# EAGLE board (Panelized-8)TheLittleEngineers.org-2732-TOFROM-2532-GCC-ECS-0001.2-09.APRIL.2019-02.JUNE.2019 (EAGLE 5.10)
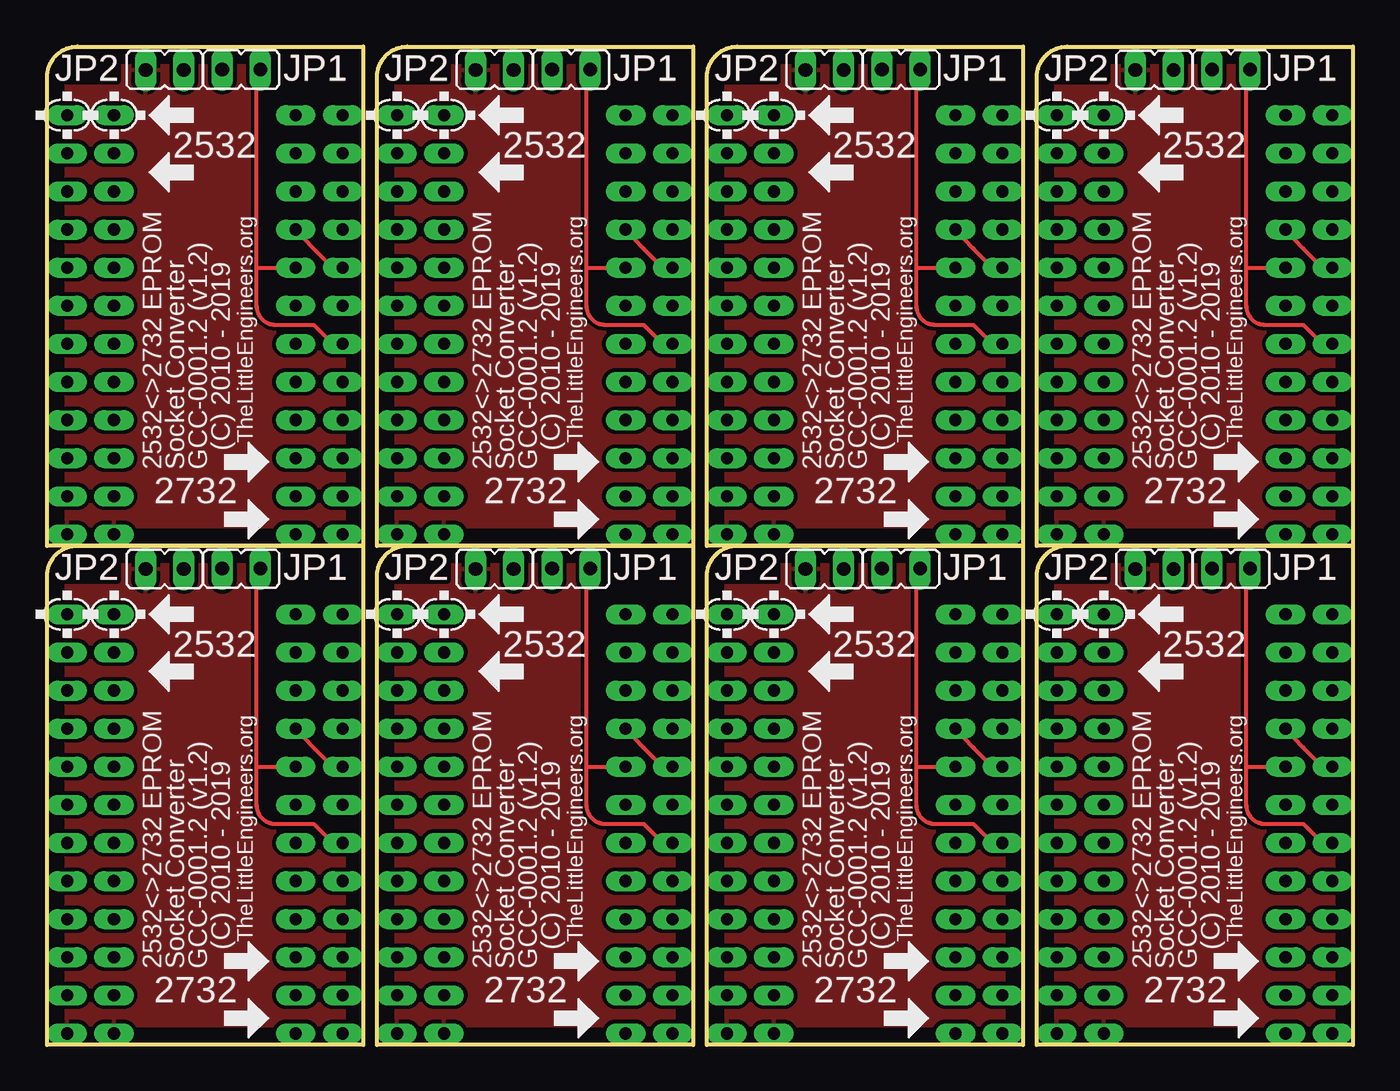
[diagram p0: board, top side]
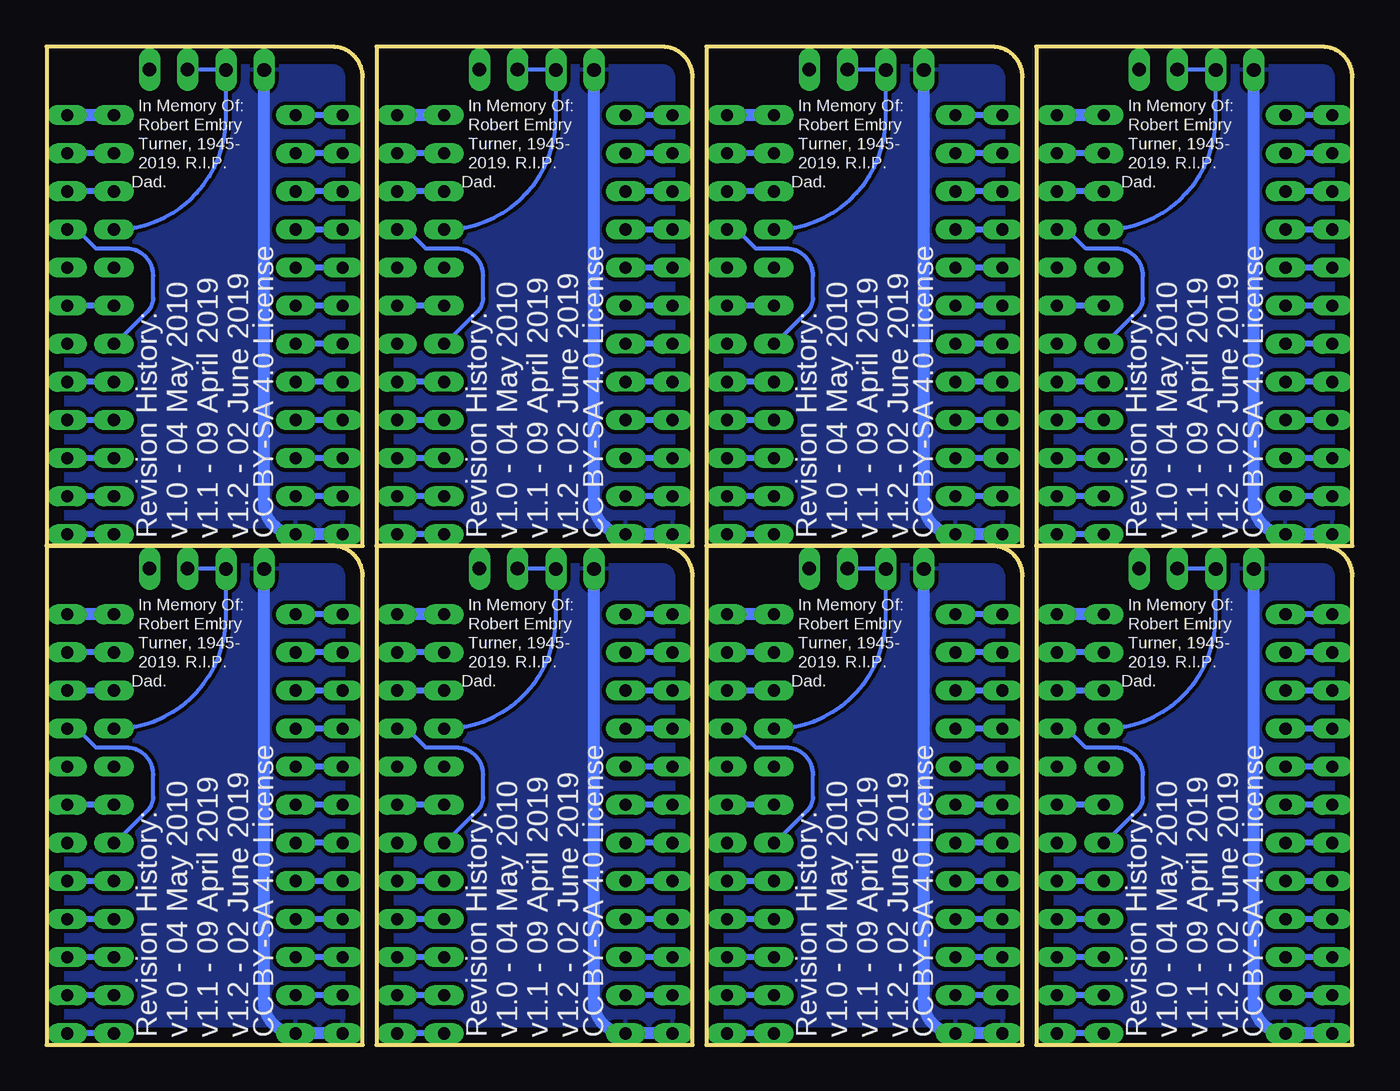
[diagram p1: board, bottom side, seen from below]

Size 87.08 x 66.54 mm. Coordinates in mm from the lower left corner, seen from the top.
Outline: 21.08,66.54 21.08,33.27 0,33.27 0,64.51 arc-90 2.03,66.54 21.08,66.54
Outline: 43.08,66.54 43.08,33.27 22,33.27 22,64.51 arc-90 24.03,66.54 43.08,66.54
Outline: 65.08,66.54 65.08,33.27 44,33.27 44,64.51 arc-90 46.03,66.54 65.08,66.54
Outline: 87.08,66.54 87.08,33.27 66,33.27 66,64.51 arc-90 68.03,66.54 87.08,66.54
Outline: 21.08,33.27 21.08,0 0,0 0,31.24 arc-90 2.03,33.27 21.08,33.27
Outline: 43.08,33.27 43.08,0 22,0 22,31.24 arc-90 24.03,33.27 43.08,33.27
Outline: 65.08,33.27 65.08,0 44,0 44,31.24 arc-90 46.03,33.27 65.08,33.27
Outline: 87.08,33.27 87.08,0 66,0 66,31.24 arc-90 68.03,33.27 87.08,33.27
Copper layers (1*16): Top 0.035mm / dielectric 1.5mm / Bottom 0.035mm
Design rules "default": minimum track width 10mil, minimum drill 24mil, track to track 8mil, track to pad 8mil, pad to pad 8mil, via to via 8mil, smd to smd 8mil, copper to edge 40mil, drill to drill 8mil, minimum pad ring 10mil, minimum via ring 8mil, stop-mask expansion 4mil, vias tented up to drill 0mil, thermal gap 10mil
Net classes: 0 default: width 0.203 mm, clearance 0.203 mm; 1 power: width 0.762 mm, clearance 0.254 mm

## Footprints (pad centres in the part's own frame; a part is rotated, then mirrored left to right if it is on the bottom)
DIL24 = drill 0.813 long: 1 -13.97,-7.62; 2 -11.43,-7.62; 3 -8.89,-7.62; 4 -6.35,-7.62; 5 -3.81,-7.62; 6 -1.27,-7.62; 7 1.27,-7.62; 8 3.81,-7.62; 9 6.35,-7.62; 10 8.89,-7.62; 11 11.43,-7.62; 12 13.97,-7.62; 13 13.97,7.62; 14 11.43,7.62; 15 8.89,7.62; 16 6.35,7.62; 17 3.81,7.62; 18 1.27,7.62; 19 -1.27,7.62; 20 -3.81,7.62; 21 -6.35,7.62; 22 -8.89,7.62; 23 -11.43,7.62; 24 -13.97,7.62
JP1 = drill 0.914 long: 1 0,-1.27; 2 0,1.27

## Placement (x,y rotation side)
IC1  2532  [DIL24]  8.97,48 270 top
IC2  2732  [DIL24]  12.09,48 270 top
IC3  2532  [DIL24]  30.97,48 270 top
IC4  2732  [DIL24]  34.09,48 270 top
IC5  2532  [DIL24]  52.97,48 270 top
IC6  2732  [DIL24]  56.09,48 270 top
IC7  2532  [DIL24]  74.97,48 270 top
IC8  2732  [DIL24]  78.09,48 270 top
IC9  2532  [DIL24]  8.97,14.73 270 top
IC10  2732  [DIL24]  12.09,14.73 270 top
IC11  2532  [DIL24]  30.97,14.73 270 top
IC12  2732  [DIL24]  34.09,14.73 270 top
IC13  2532  [DIL24]  52.97,14.73 270 top
IC14  2732  [DIL24]  56.09,14.73 270 top
IC15  2532  [DIL24]  74.97,14.73 270 top
IC16  2732  [DIL24]  78.09,14.73 270 top
JP1  [JP1]  12.95,65.02 270 top
JP2  [JP1]  7.85,64.99 270 top
JP3  [JP1]  34.95,65.02 270 top
JP4  [JP1]  29.85,64.99 270 top
JP5  [JP1]  56.95,65.02 270 top
JP6  [JP1]  51.85,64.99 270 top
JP7  [JP1]  78.95,65.02 270 top
JP8  [JP1]  73.85,64.99 270 top
JP9  [JP1]  12.95,31.75 270 top
JP10  [JP1]  7.85,31.72 270 top
JP11  [JP1]  34.95,31.75 270 top
JP12  [JP1]  29.85,31.72 270 top
JP13  [JP1]  56.95,31.75 270 top
JP14  [JP1]  51.85,31.72 270 top
JP15  [JP1]  78.95,31.75 270 top
JP16  [JP1]  73.85,31.72 270 top
U$1  [ARROW-L]  8.13,61.97 0 top
U$2  [ARROW-L]  8.13,58.16 0 top
U$3  [ARROW-R]  13.46,38.86 0 top
U$4  [ARROW-R]  13.46,35.05 0 top
U$5  [ARROW-L]  30.13,61.97 0 top
U$6  [ARROW-L]  30.13,58.16 0 top
U$7  [ARROW-R]  35.46,38.86 0 top
U$8  [ARROW-R]  35.46,35.05 0 top
U$9  [ARROW-L]  52.13,61.97 0 top
U$10  [ARROW-L]  52.13,58.16 0 top
U$11  [ARROW-R]  57.46,38.86 0 top
U$12  [ARROW-R]  57.46,35.05 0 top
U$13  [ARROW-L]  74.13,61.97 0 top
U$14  [ARROW-L]  74.13,58.16 0 top
U$15  [ARROW-R]  79.46,38.86 0 top
U$16  [ARROW-R]  79.46,35.05 0 top
U$17  [ARROW-L]  8.13,28.7 0 top
U$18  [ARROW-L]  8.13,24.89 0 top
U$19  [ARROW-R]  13.46,5.59 0 top
U$20  [ARROW-R]  13.46,1.78 0 top
U$21  [ARROW-L]  30.13,28.7 0 top
U$22  [ARROW-L]  30.13,24.89 0 top
U$23  [ARROW-R]  35.46,5.59 0 top
U$24  [ARROW-R]  35.46,1.78 0 top
U$25  [ARROW-L]  52.13,28.7 0 top
U$26  [ARROW-L]  52.13,24.89 0 top
U$27  [ARROW-R]  57.46,5.59 0 top
U$28  [ARROW-R]  57.46,1.78 0 top
U$29  [ARROW-L]  74.13,28.7 0 top
U$30  [ARROW-L]  74.13,24.89 0 top
U$31  [ARROW-R]  79.46,5.59 0 top
U$32  [ARROW-R]  79.46,1.78 0 top

## Library data of the parts
IC1-IC16 JP1-JP16 U$1-U$32 = TheLittleEngineers.org-2732-TOFROM-2532-GCC-ECS-0001.2-09.APRIL.2019-02.JUNE.2019

## Nets
GND [power]: IC1.12 IC2.12 JP2.1
GND1 [power]: IC3.12 IC4.12 JP4.1
GND2 [power]: IC5.12 IC6.12 JP6.1
GND3 [power]: IC7.12 IC8.12 JP8.1
GND4 [power]: IC9.12 IC10.12 JP10.1
GND5 [power]: IC11.12 IC12.12 JP12.1
GND6 [power]: IC13.12 IC14.12 JP14.1
GND7 [power]: IC15.12 IC16.12 JP16.1
N$1: IC1.8 IC2.8
N$2: IC1.7 IC2.7
N$3: IC1.6 IC2.6
N$4: IC1.5 IC2.5
N$5: IC1.4 IC2.4
N$6: IC1.3 IC2.3
N$7: IC1.2 IC2.2
N$8: IC1.1 IC2.1
N$9: IC1.23 IC2.23
N$10: IC1.22 IC2.22
N$11: IC1.19 IC2.19
N$12: IC1.18 IC2.21
N$13: IC1.20 IC2.18 JP1.2
N$14: IC1.21 IC2.20 JP1.1 JP2.2
N$15: IC1.9 IC2.9
N$16: IC1.10 IC2.10
N$17: IC1.11 IC2.11
N$18: IC1.13 IC2.13
N$19: IC1.14 IC2.14
N$20: IC1.15 IC2.15
N$21: IC1.16 IC2.16
N$22: IC1.17 IC2.17
N$23: IC3.8 IC4.8
N$24: IC3.7 IC4.7
N$25: IC3.6 IC4.6
N$26: IC3.5 IC4.5
N$27: IC3.4 IC4.4
N$28: IC3.3 IC4.3
N$29: IC3.2 IC4.2
N$30: IC3.1 IC4.1
N$31: IC3.23 IC4.23
N$32: IC3.22 IC4.22
N$33: IC3.19 IC4.19
N$34: IC3.18 IC4.21
N$35: IC3.20 IC4.18 JP3.2
N$36: IC3.21 IC4.20 JP3.1 JP4.2
N$37: IC3.9 IC4.9
N$38: IC3.10 IC4.10
N$39: IC3.11 IC4.11
N$40: IC3.13 IC4.13
N$41: IC3.14 IC4.14
N$42: IC3.15 IC4.15
N$43: IC3.16 IC4.16
N$44: IC3.17 IC4.17
N$45: IC5.8 IC6.8
N$46: IC5.7 IC6.7
N$47: IC5.6 IC6.6
N$48: IC5.5 IC6.5
N$49: IC5.4 IC6.4
N$50: IC5.3 IC6.3
N$51: IC5.2 IC6.2
N$52: IC5.1 IC6.1
N$53: IC5.23 IC6.23
N$54: IC5.22 IC6.22
N$55: IC5.19 IC6.19
N$56: IC5.18 IC6.21
N$57: IC5.20 IC6.18 JP5.2
N$58: IC5.21 IC6.20 JP5.1 JP6.2
N$59: IC5.9 IC6.9
N$60: IC5.10 IC6.10
N$61: IC5.11 IC6.11
N$62: IC5.13 IC6.13
N$63: IC5.14 IC6.14
N$64: IC5.15 IC6.15
N$65: IC5.16 IC6.16
N$66: IC5.17 IC6.17
N$67: IC7.8 IC8.8
N$68: IC7.7 IC8.7
N$69: IC7.6 IC8.6
N$70: IC7.5 IC8.5
N$71: IC7.4 IC8.4
N$72: IC7.3 IC8.3
N$73: IC7.2 IC8.2
N$74: IC7.1 IC8.1
N$75: IC7.23 IC8.23
N$76: IC7.22 IC8.22
N$77: IC7.19 IC8.19
N$78: IC7.18 IC8.21
N$79: IC7.20 IC8.18 JP7.2
N$80: IC7.21 IC8.20 JP7.1 JP8.2
N$81: IC7.9 IC8.9
N$82: IC7.10 IC8.10
N$83: IC7.11 IC8.11
N$84: IC7.13 IC8.13
N$85: IC7.14 IC8.14
N$86: IC7.15 IC8.15
N$87: IC7.16 IC8.16
N$88: IC7.17 IC8.17
N$89: IC9.8 IC10.8
N$90: IC9.7 IC10.7
N$91: IC9.6 IC10.6
N$92: IC9.5 IC10.5
N$93: IC9.4 IC10.4
N$94: IC9.3 IC10.3
N$95: IC9.2 IC10.2
N$96: IC9.1 IC10.1
N$97: IC9.23 IC10.23
N$98: IC9.22 IC10.22
N$99: IC9.19 IC10.19
N$100: IC9.18 IC10.21
N$101: IC9.20 IC10.18 JP9.2
N$102: IC9.21 IC10.20 JP9.1 JP10.2
N$103: IC9.9 IC10.9
N$104: IC9.10 IC10.10
N$105: IC9.11 IC10.11
N$106: IC9.13 IC10.13
N$107: IC9.14 IC10.14
N$108: IC9.15 IC10.15
N$109: IC9.16 IC10.16
N$110: IC9.17 IC10.17
N$111: IC11.8 IC12.8
N$112: IC11.7 IC12.7
N$113: IC11.6 IC12.6
N$114: IC11.5 IC12.5
N$115: IC11.4 IC12.4
N$116: IC11.3 IC12.3
N$117: IC11.2 IC12.2
N$118: IC11.1 IC12.1
N$119: IC11.23 IC12.23
N$120: IC11.22 IC12.22
N$121: IC11.19 IC12.19
N$122: IC11.18 IC12.21
N$123: IC11.20 IC12.18 JP11.2
N$124: IC11.21 IC12.20 JP11.1 JP12.2
N$125: IC11.9 IC12.9
N$126: IC11.10 IC12.10
N$127: IC11.11 IC12.11
N$128: IC11.13 IC12.13
N$129: IC11.14 IC12.14
N$130: IC11.15 IC12.15
N$131: IC11.16 IC12.16
N$132: IC11.17 IC12.17
N$133: IC13.8 IC14.8
N$134: IC13.7 IC14.7
N$135: IC13.6 IC14.6
N$136: IC13.5 IC14.5
N$137: IC13.4 IC14.4
N$138: IC13.3 IC14.3
N$139: IC13.2 IC14.2
N$140: IC13.1 IC14.1
N$141: IC13.23 IC14.23
N$142: IC13.22 IC14.22
N$143: IC13.19 IC14.19
N$144: IC13.18 IC14.21
N$145: IC13.20 IC14.18 JP13.2
N$146: IC13.21 IC14.20 JP13.1 JP14.2
N$147: IC13.9 IC14.9
N$148: IC13.10 IC14.10
N$149: IC13.11 IC14.11
N$150: IC13.13 IC14.13
N$151: IC13.14 IC14.14
N$152: IC13.15 IC14.15
N$153: IC13.16 IC14.16
N$154: IC13.17 IC14.17
N$155: IC15.8 IC16.8
N$156: IC15.7 IC16.7
N$157: IC15.6 IC16.6
N$158: IC15.5 IC16.5
N$159: IC15.4 IC16.4
N$160: IC15.3 IC16.3
N$161: IC15.2 IC16.2
N$162: IC15.1 IC16.1
N$163: IC15.23 IC16.23
N$164: IC15.22 IC16.22
N$165: IC15.19 IC16.19
N$166: IC15.18 IC16.21
N$167: IC15.20 IC16.18 JP15.2
N$168: IC15.21 IC16.20 JP15.1 JP16.2
N$169: IC15.9 IC16.9
N$170: IC15.10 IC16.10
N$171: IC15.11 IC16.11
N$172: IC15.13 IC16.13
N$173: IC15.14 IC16.14
N$174: IC15.15 IC16.15
N$175: IC15.16 IC16.16
N$176: IC15.17 IC16.17
VCC [power]: IC1.24 IC2.24
VCC1 [power]: IC3.24 IC4.24
VCC2 [power]: IC5.24 IC6.24
VCC3 [power]: IC7.24 IC8.24
VCC4 [power]: IC9.24 IC10.24
VCC5 [power]: IC11.24 IC12.24
VCC6 [power]: IC13.24 IC14.24
VCC7 [power]: IC15.24 IC16.24

## Tracks (layer width: path | path; a pad name or v marks a point on that pad's centre or on a via)
GND
  Bottom 0.813: IC1.12 IC2.12 arc90 6.58,36.14 JP2.1
  pour Bottom: 21.08,66.54 0,66.54 0,33.27 21.08,33.27
  pour Top: 21.08,66.54 0,66.54 0,33.27 21.08,33.27
GND1
  Bottom 0.813: IC3.12 IC4.12 arc90 28.58,36.14 JP4.1
  pour Bottom: 43.08,66.54 22,66.54 22,33.27 43.08,33.27
  pour Top: 43.08,66.54 22,66.54 22,33.27 43.08,33.27
GND2
  Bottom 0.813: IC5.12 IC6.12 arc90 50.58,36.14 JP6.1
  pour Bottom: 65.08,66.54 44,66.54 44,33.27 65.08,33.27
  pour Top: 65.08,66.54 44,66.54 44,33.27 65.08,33.27
GND3
  Bottom 0.813: IC7.12 IC8.12 arc90 72.58,36.14 JP8.1
  pour Bottom: 87.08,66.54 66,66.54 66,33.27 87.08,33.27
  pour Top: 87.08,66.54 66,66.54 66,33.27 87.08,33.27
GND4
  Bottom 0.813: IC9.12 IC10.12 arc90 6.58,2.87 JP10.1
  pour Bottom: 21.08,33.27 0,33.27 0,0 21.08,0
  pour Top: 21.08,33.27 0,33.27 0,0 21.08,0
GND5
  Bottom 0.813: IC11.12 IC12.12 arc90 28.58,2.87 JP12.1
  pour Bottom: 43.08,33.27 22,33.27 22,0 43.08,0
  pour Top: 43.08,33.27 22,33.27 22,0 43.08,0
GND6
  Bottom 0.813: IC13.12 IC14.12 arc90 50.58,2.87 JP14.1
  pour Bottom: 65.08,33.27 44,33.27 44,0 65.08,0
  pour Top: 65.08,33.27 44,33.27 44,0 65.08,0
GND7
  Bottom 0.813: IC15.12 IC16.12 arc90 72.58,2.87 JP16.1
  pour Bottom: 87.08,33.27 66,33.27 66,0 87.08,0
  pour Top: 87.08,33.27 66,33.27 66,0 87.08,0
N$1
  Bottom 0.406: IC1.8 IC2.8
N$2
  Bottom 0.406: IC1.7 IC2.7
N$3
  Bottom 0.406: IC1.6 IC2.6
N$4
  Bottom 0.406: IC1.5 IC2.5
N$5
  Bottom 0.406: IC1.4 IC2.4
N$6
  Bottom 0.406: IC1.3 IC2.3
N$7
  Bottom 0.406: IC1.2 IC2.2
N$8
  Bottom 0.406: IC1.1 IC2.1
N$9
  Bottom 0.406: IC1.23 IC2.23
N$10
  Bottom 0.406: IC1.22 IC2.22
N$11
  Bottom 0.406: IC1.19 IC2.19
N$12
  Bottom 0.254: IC1.18 16.51,46.73 14.34,48.9 arc-45 13.97,49.8 13.97,51.29 arc-90 15.77,53.08 17.78,53.08 19.05,54.35 IC2.21
N$13
  Top 0.254: 13.97,51.81 13.97,64.51 JP1.2 | 13.97,51.81 13.97,49.27 arc90 15.24,48 17.78,48 19.05,46.73 IC2.18 | 13.97,51.81 IC1.20
N$14
  Top 0.254: IC2.20 19.05,51.81 17.78,53.08 IC1.21
  Bottom 0.254: 11.66,64.99 JP2.2 9.12,61.82 arc90 IC1.21
  Bottom 0.813: 11.66,64.99 arc90 JP1.1
N$15
  Bottom 0.406: IC1.9 IC2.9
N$16
  Bottom 0.406: IC1.10 IC2.10
N$17
  Bottom 0.406: IC1.11 IC2.11
N$18
  Bottom 0.406: IC1.13 IC2.13
N$19
  Bottom 0.406: IC1.14 IC2.14
N$20
  Bottom 0.406: IC1.15 IC2.15
N$21
  Bottom 0.406: IC1.16 IC2.16
N$22
  Bottom 0.406: IC1.17 IC2.17
N$23
  Bottom 0.406: IC3.8 IC4.8
N$24
  Bottom 0.406: IC3.7 IC4.7
N$25
  Bottom 0.406: IC3.6 IC4.6
N$26
  Bottom 0.406: IC3.5 IC4.5
N$27
  Bottom 0.406: IC3.4 IC4.4
N$28
  Bottom 0.406: IC3.3 IC4.3
N$29
  Bottom 0.406: IC3.2 IC4.2
N$30
  Bottom 0.406: IC3.1 IC4.1
N$31
  Bottom 0.406: IC3.23 IC4.23
N$32
  Bottom 0.406: IC3.22 IC4.22
N$33
  Bottom 0.406: IC3.19 IC4.19
N$34
  Bottom 0.254: IC3.18 38.51,46.73 36.34,48.9 arc-45 35.97,49.8 35.97,51.29 arc-90 37.77,53.08 39.78,53.08 41.05,54.35 IC4.21
N$35
  Top 0.254: 35.97,51.81 35.97,64.51 JP3.2 | 35.97,51.81 35.97,49.27 arc90 37.24,48 39.78,48 41.05,46.73 IC4.18 | 35.97,51.81 IC3.20
N$36
  Top 0.254: IC4.20 41.05,51.81 39.78,53.08 IC3.21
  Bottom 0.254: 33.66,64.99 JP4.2 31.12,61.82 arc90 IC3.21
  Bottom 0.813: 33.66,64.99 arc90 JP3.1
N$37
  Bottom 0.406: IC3.9 IC4.9
N$38
  Bottom 0.406: IC3.10 IC4.10
N$39
  Bottom 0.406: IC3.11 IC4.11
N$40
  Bottom 0.406: IC3.13 IC4.13
N$41
  Bottom 0.406: IC3.14 IC4.14
N$42
  Bottom 0.406: IC3.15 IC4.15
N$43
  Bottom 0.406: IC3.16 IC4.16
N$44
  Bottom 0.406: IC3.17 IC4.17
N$45
  Bottom 0.406: IC5.8 IC6.8
N$46
  Bottom 0.406: IC5.7 IC6.7
N$47
  Bottom 0.406: IC5.6 IC6.6
N$48
  Bottom 0.406: IC5.5 IC6.5
N$49
  Bottom 0.406: IC5.4 IC6.4
N$50
  Bottom 0.406: IC5.3 IC6.3
N$51
  Bottom 0.406: IC5.2 IC6.2
N$52
  Bottom 0.406: IC5.1 IC6.1
N$53
  Bottom 0.406: IC5.23 IC6.23
N$54
  Bottom 0.406: IC5.22 IC6.22
N$55
  Bottom 0.406: IC5.19 IC6.19
N$56
  Bottom 0.254: IC5.18 60.51,46.73 58.34,48.9 arc-45 57.97,49.8 57.97,51.29 arc-90 59.77,53.08 61.78,53.08 63.05,54.35 IC6.21
N$57
  Top 0.254: 57.97,51.81 57.97,64.51 JP5.2 | 57.97,51.81 57.97,49.27 arc90 59.24,48 61.78,48 63.05,46.73 IC6.18 | 57.97,51.81 IC5.20
N$58
  Top 0.254: IC6.20 63.05,51.81 61.78,53.08 IC5.21
  Bottom 0.254: 55.66,64.99 JP6.2 53.12,61.82 arc90 IC5.21
  Bottom 0.813: 55.66,64.99 arc90 JP5.1
N$59
  Bottom 0.406: IC5.9 IC6.9
N$60
  Bottom 0.406: IC5.10 IC6.10
N$61
  Bottom 0.406: IC5.11 IC6.11
N$62
  Bottom 0.406: IC5.13 IC6.13
N$63
  Bottom 0.406: IC5.14 IC6.14
N$64
  Bottom 0.406: IC5.15 IC6.15
N$65
  Bottom 0.406: IC5.16 IC6.16
N$66
  Bottom 0.406: IC5.17 IC6.17
N$67
  Bottom 0.406: IC7.8 IC8.8
N$68
  Bottom 0.406: IC7.7 IC8.7
N$69
  Bottom 0.406: IC7.6 IC8.6
N$70
  Bottom 0.406: IC7.5 IC8.5
N$71
  Bottom 0.406: IC7.4 IC8.4
N$72
  Bottom 0.406: IC7.3 IC8.3
N$73
  Bottom 0.406: IC7.2 IC8.2
N$74
  Bottom 0.406: IC7.1 IC8.1
N$75
  Bottom 0.406: IC7.23 IC8.23
N$76
  Bottom 0.406: IC7.22 IC8.22
N$77
  Bottom 0.406: IC7.19 IC8.19
N$78
  Bottom 0.254: IC7.18 82.51,46.73 80.34,48.9 arc-45 79.97,49.8 79.97,51.29 arc-90 81.77,53.08 83.78,53.08 85.05,54.35 IC8.21
N$79
  Top 0.254: 79.97,51.81 79.97,64.51 JP7.2 | 79.97,51.81 79.97,49.27 arc90 81.24,48 83.78,48 85.05,46.73 IC8.18 | 79.97,51.81 IC7.20
N$80
  Top 0.254: IC8.20 85.05,51.81 83.78,53.08 IC7.21
  Bottom 0.254: 77.66,64.99 JP8.2 75.12,61.82 arc90 IC7.21
  Bottom 0.813: 77.66,64.99 arc90 JP7.1
N$81
  Bottom 0.406: IC7.9 IC8.9
N$82
  Bottom 0.406: IC7.10 IC8.10
N$83
  Bottom 0.406: IC7.11 IC8.11
N$84
  Bottom 0.406: IC7.13 IC8.13
N$85
  Bottom 0.406: IC7.14 IC8.14
N$86
  Bottom 0.406: IC7.15 IC8.15
N$87
  Bottom 0.406: IC7.16 IC8.16
N$88
  Bottom 0.406: IC7.17 IC8.17
N$89
  Bottom 0.406: IC9.8 IC10.8
N$90
  Bottom 0.406: IC9.7 IC10.7
N$91
  Bottom 0.406: IC9.6 IC10.6
N$92
  Bottom 0.406: IC9.5 IC10.5
N$93
  Bottom 0.406: IC9.4 IC10.4
N$94
  Bottom 0.406: IC9.3 IC10.3
N$95
  Bottom 0.406: IC9.2 IC10.2
N$96
  Bottom 0.406: IC9.1 IC10.1
N$97
  Bottom 0.406: IC9.23 IC10.23
N$98
  Bottom 0.406: IC9.22 IC10.22
N$99
  Bottom 0.406: IC9.19 IC10.19
N$100
  Bottom 0.254: IC9.18 16.51,13.46 14.34,15.63 arc-45 13.97,16.53 13.97,18.02 arc-90 15.77,19.81 17.78,19.81 19.05,21.08 IC10.21
N$101
  Top 0.254: 13.97,18.54 13.97,31.24 JP9.2 | 13.97,18.54 13.97,16 arc90 15.24,14.73 17.78,14.73 19.05,13.46 IC10.18 | 13.97,18.54 IC9.20
N$102
  Top 0.254: IC10.20 19.05,18.54 17.78,19.81 IC9.21
  Bottom 0.254: 11.66,31.72 JP10.2 9.12,28.55 arc90 IC9.21
  Bottom 0.813: 11.66,31.72 arc90 JP9.1
N$103
  Bottom 0.406: IC9.9 IC10.9
N$104
  Bottom 0.406: IC9.10 IC10.10
N$105
  Bottom 0.406: IC9.11 IC10.11
N$106
  Bottom 0.406: IC9.13 IC10.13
N$107
  Bottom 0.406: IC9.14 IC10.14
N$108
  Bottom 0.406: IC9.15 IC10.15
N$109
  Bottom 0.406: IC9.16 IC10.16
N$110
  Bottom 0.406: IC9.17 IC10.17
N$111
  Bottom 0.406: IC11.8 IC12.8
N$112
  Bottom 0.406: IC11.7 IC12.7
N$113
  Bottom 0.406: IC11.6 IC12.6
N$114
  Bottom 0.406: IC11.5 IC12.5
N$115
  Bottom 0.406: IC11.4 IC12.4
N$116
  Bottom 0.406: IC11.3 IC12.3
N$117
  Bottom 0.406: IC11.2 IC12.2
N$118
  Bottom 0.406: IC11.1 IC12.1
N$119
  Bottom 0.406: IC11.23 IC12.23
N$120
  Bottom 0.406: IC11.22 IC12.22
N$121
  Bottom 0.406: IC11.19 IC12.19
N$122
  Bottom 0.254: IC11.18 38.51,13.46 36.34,15.63 arc-45 35.97,16.53 35.97,18.02 arc-90 37.77,19.81 39.78,19.81 41.05,21.08 IC12.21
N$123
  Top 0.254: 35.97,18.54 35.97,31.24 JP11.2 | 35.97,18.54 35.97,16 arc90 37.24,14.73 39.78,14.73 41.05,13.46 IC12.18 | 35.97,18.54 IC11.20
N$124
  Top 0.254: IC12.20 41.05,18.54 39.78,19.81 IC11.21
  Bottom 0.254: 33.66,31.72 JP12.2 31.12,28.55 arc90 IC11.21
  Bottom 0.813: 33.66,31.72 arc90 JP11.1
N$125
  Bottom 0.406: IC11.9 IC12.9
N$126
  Bottom 0.406: IC11.10 IC12.10
N$127
  Bottom 0.406: IC11.11 IC12.11
N$128
  Bottom 0.406: IC11.13 IC12.13
N$129
  Bottom 0.406: IC11.14 IC12.14
N$130
  Bottom 0.406: IC11.15 IC12.15
N$131
  Bottom 0.406: IC11.16 IC12.16
N$132
  Bottom 0.406: IC11.17 IC12.17
N$133
  Bottom 0.406: IC13.8 IC14.8
N$134
  Bottom 0.406: IC13.7 IC14.7
N$135
  Bottom 0.406: IC13.6 IC14.6
N$136
  Bottom 0.406: IC13.5 IC14.5
N$137
  Bottom 0.406: IC13.4 IC14.4
N$138
  Bottom 0.406: IC13.3 IC14.3
N$139
  Bottom 0.406: IC13.2 IC14.2
N$140
  Bottom 0.406: IC13.1 IC14.1
N$141
  Bottom 0.406: IC13.23 IC14.23
N$142
  Bottom 0.406: IC13.22 IC14.22
N$143
  Bottom 0.406: IC13.19 IC14.19
N$144
  Bottom 0.254: IC13.18 60.51,13.46 58.34,15.63 arc-45 57.97,16.53 57.97,18.02 arc-90 59.77,19.81 61.78,19.81 63.05,21.08 IC14.21
N$145
  Top 0.254: 57.97,18.54 57.97,31.24 JP13.2 | 57.97,18.54 57.97,16 arc90 59.24,14.73 61.78,14.73 63.05,13.46 IC14.18 | 57.97,18.54 IC13.20
N$146
  Top 0.254: IC14.20 63.05,18.54 61.78,19.81 IC13.21
  Bottom 0.254: 55.66,31.72 JP14.2 53.12,28.55 arc90 IC13.21
  Bottom 0.813: 55.66,31.72 arc90 JP13.1
N$147
  Bottom 0.406: IC13.9 IC14.9
N$148
  Bottom 0.406: IC13.10 IC14.10
N$149
  Bottom 0.406: IC13.11 IC14.11
N$150
  Bottom 0.406: IC13.13 IC14.13
N$151
  Bottom 0.406: IC13.14 IC14.14
N$152
  Bottom 0.406: IC13.15 IC14.15
N$153
  Bottom 0.406: IC13.16 IC14.16
N$154
  Bottom 0.406: IC13.17 IC14.17
N$155
  Bottom 0.406: IC15.8 IC16.8
N$156
  Bottom 0.406: IC15.7 IC16.7
N$157
  Bottom 0.406: IC15.6 IC16.6
N$158
  Bottom 0.406: IC15.5 IC16.5
N$159
  Bottom 0.406: IC15.4 IC16.4
N$160
  Bottom 0.406: IC15.3 IC16.3
N$161
  Bottom 0.406: IC15.2 IC16.2
N$162
  Bottom 0.406: IC15.1 IC16.1
N$163
  Bottom 0.406: IC15.23 IC16.23
N$164
  Bottom 0.406: IC15.22 IC16.22
N$165
  Bottom 0.406: IC15.19 IC16.19
N$166
  Bottom 0.254: IC15.18 82.51,13.46 80.34,15.63 arc-45 79.97,16.53 79.97,18.02 arc-90 81.77,19.81 83.78,19.81 85.05,21.08 IC16.21
N$167
  Top 0.254: 79.97,18.54 79.97,31.24 JP15.2 | 79.97,18.54 79.97,16 arc90 81.24,14.73 83.78,14.73 85.05,13.46 IC16.18 | 79.97,18.54 IC15.20
N$168
  Top 0.254: IC16.20 85.05,18.54 83.78,19.81 IC15.21
  Bottom 0.254: 77.66,31.72 JP16.2 75.12,28.55 arc90 IC15.21
  Bottom 0.813: 77.66,31.72 arc90 JP15.1
N$169
  Bottom 0.406: IC15.9 IC16.9
N$170
  Bottom 0.406: IC15.10 IC16.10
N$171
  Bottom 0.406: IC15.11 IC16.11
N$172
  Bottom 0.406: IC15.13 IC16.13
N$173
  Bottom 0.406: IC15.14 IC16.14
N$174
  Bottom 0.406: IC15.15 IC16.15
N$175
  Bottom 0.406: IC15.16 IC16.16
N$176
  Bottom 0.406: IC15.17 IC16.17
VCC
  Bottom 0.813: IC1.24 IC2.24
VCC1
  Bottom 0.813: IC3.24 IC4.24
VCC2
  Bottom 0.813: IC5.24 IC6.24
VCC3
  Bottom 0.813: IC7.24 IC8.24
VCC4
  Bottom 0.813: IC9.24 IC10.24
VCC5
  Bottom 0.813: IC11.24 IC12.24
VCC6
  Bottom 0.813: IC13.24 IC14.24
VCC7
  Bottom 0.813: IC15.24 IC16.24

## Text on the board
Top: JP2 | JP1 | JP2 | JP1 | JP2 | JP1 | JP2 | JP1 | JP2 | JP1 | JP2 | JP1 | JP2 | JP1 | JP2 | JP1
tPlace: JP2 | JP1 | JP2 | JP1 | JP2 | JP1 | JP2 | JP1 | TheLittleEngineers.org | TheLittleEngineers.org | TheLittleEngineers.org | TheLittleEngineers.org | (C) 2010 - 2019 | (C) 2010 - 2019 | (C) 2010 - 2019 | (C) 2010 - 2019 | 2532<>2732 EPROM | Socket Converter | GCC-0001.2 (v1.2) | 2532<>2732 EPROM | Socket Converter | GCC-0001.2 (v1.2) | 2532<>2732 EPROM | Socket Converter | GCC-0001.2 (v1.2) | 2532<>2732 EPROM | Socket Converter | GCC-0001.2 (v1.2) | JP2 | JP1 | JP2 | JP1 | JP2 | JP1 | JP2 | JP1 | (C) 2010 - 2019 | TheLittleEngineers.org | (C) 2010 - 2019 | TheLittleEngineers.org | (C) 2010 - 2019 | TheLittleEngineers.org | (C) 2010 - 2019 | TheLittleEngineers.org | 2532<>2732 EPROM | Socket Converter | GCC-0001.2 (v1.2) | 2532<>2732 EPROM | Socket Converter | GCC-0001.2 (v1.2) | 2532<>2732 EPROM | Socket Converter | GCC-0001.2 (v1.2) | 2532<>2732 EPROM | Socket Converter | GCC-0001.2 (v1.2)
bPlace: In Memory Of: | In Memory Of: | In Memory Of: | In Memory Of: | Robert Embry | Robert Embry | Robert Embry | Robert Embry | Turner, 1945- | Turner, 1945- | Turner, 1945- | Turner, 1945- | 2019. R.I.P. | 2019. R.I.P. | 2019. R.I.P. | 2019. R.I.P. | Dad. | Dad. | Dad. | Dad. | CC BY-SA 4.0 License | v1.2 - 02 June 2019 | v1.1 - 09 April 2019 | v1.0 - 04 May 2010 | Revision History: | CC BY-SA 4.0 License | v1.2 - 02 June 2019 | v1.1 - 09 April 2019 | v1.0 - 04 May 2010 | Revision History: | CC BY-SA 4.0 License | v1.2 - 02 June 2019 | v1.1 - 09 April 2019 | v1.0 - 04 May 2010 | Revision History: | CC BY-SA 4.0 License | v1.2 - 02 June 2019 | v1.1 - 09 April 2019 | v1.0 - 04 May 2010 | Revision History: | In Memory Of: | In Memory Of: | In Memory Of: | In Memory Of: | Robert Embry | Robert Embry | Robert Embry | Robert Embry | Turner, 1945- | Turner, 1945- | Turner, 1945- | Turner, 1945- | 2019. R.I.P. | 2019. R.I.P. | 2019. R.I.P. | 2019. R.I.P. | Dad. | Dad. | Dad. | Dad. | CC BY-SA 4.0 License | v1.2 - 02 June 2019 | v1.1 - 09 April 2019 | v1.0 - 04 May 2010 | Revision History: | CC BY-SA 4.0 License | v1.2 - 02 June 2019 | v1.1 - 09 April 2019 | v1.0 - 04 May 2010 | Revision History: | CC BY-SA 4.0 License | v1.2 - 02 June 2019 | v1.1 - 09 April 2019 | v1.0 - 04 May 2010 | Revision History: | CC BY-SA 4.0 License | v1.2 - 02 June 2019 | v1.1 - 09 April 2019 | v1.0 - 04 May 2010 | Revision History: